# Altium PCB PCB1.PcbDoc
Units mil, origin at the board's own origin, x right, y up, seen from the top; angles counter-clockwise.
Board outline 2917.32 x 791.34 mil, 2 copper layers (Top Layer, Bottom Layer), stack 61.855 mil thick; 44 components, 37 nets, 168 pads, 85 vias.
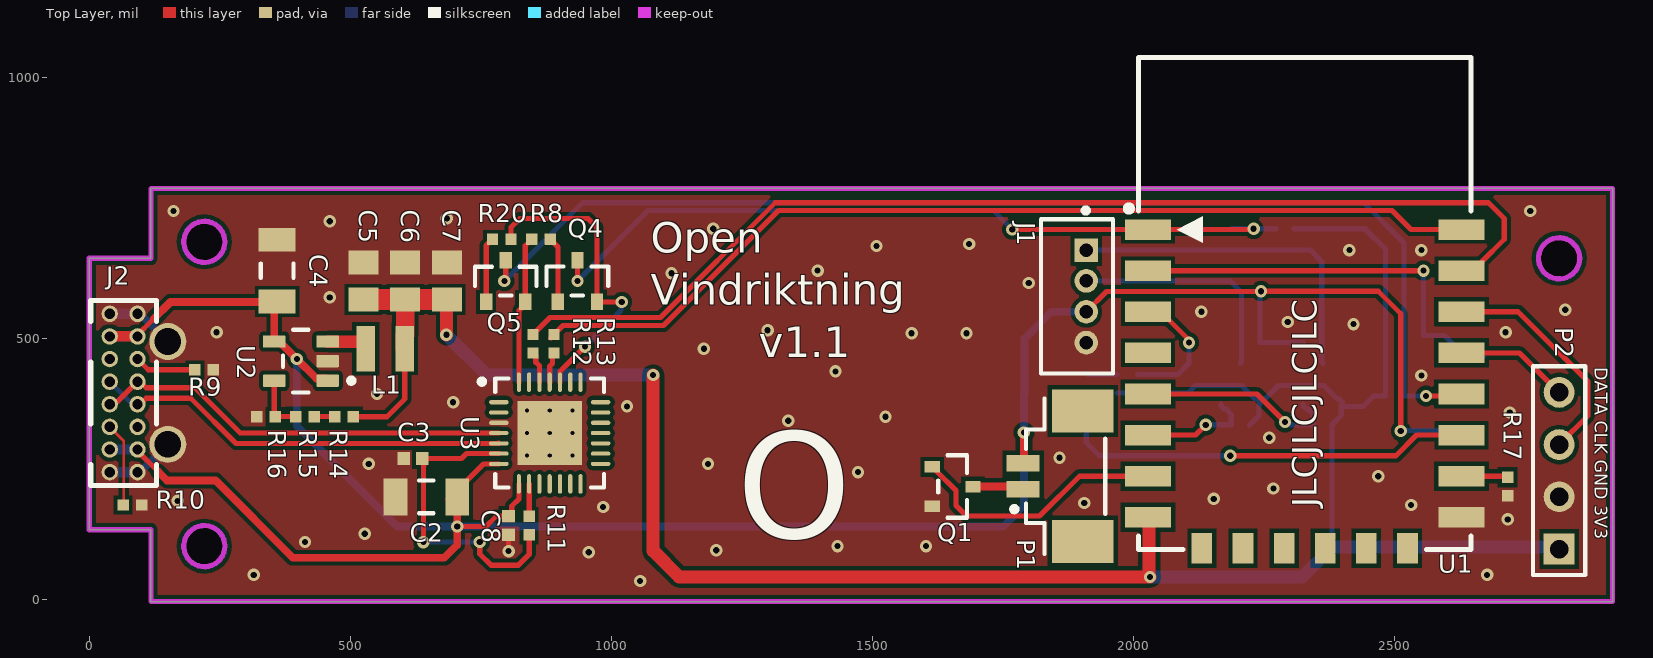
[diagram p0: Top Layer view]
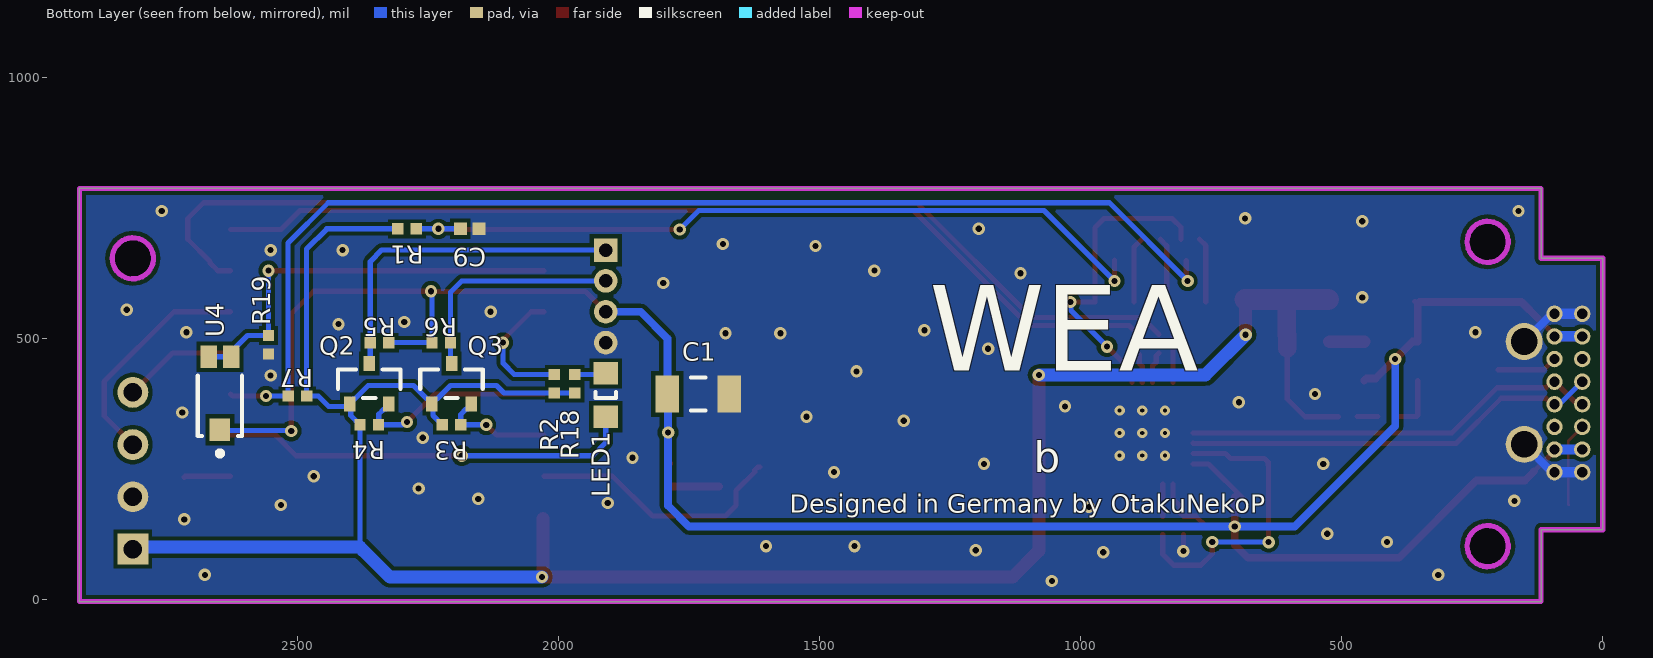
[diagram p1: Bottom Layer view, seen from below]
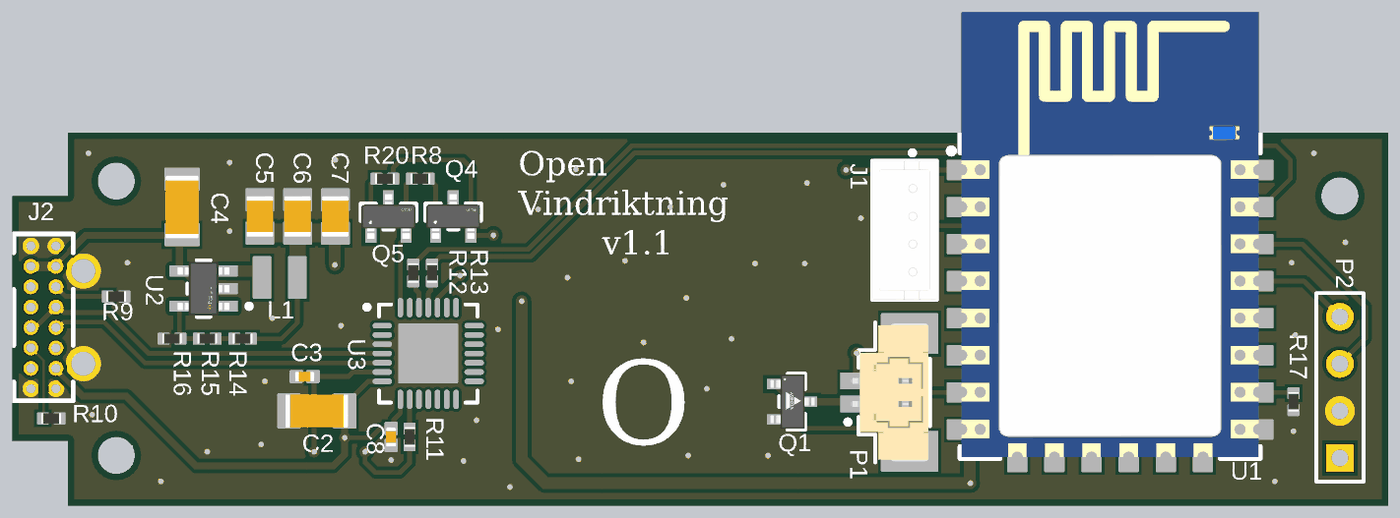
[diagram p2: 3D render of the assembled board from above, using the file's embedded part models]
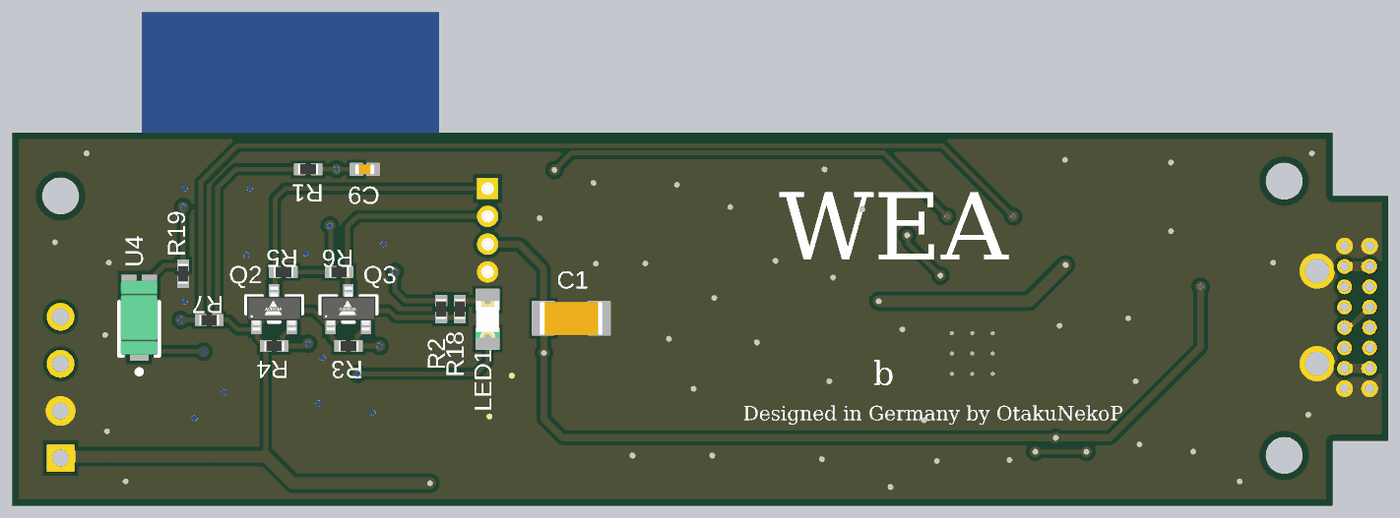
[diagram p3: 3D render of the assembled board from below, using the file's embedded part models]

## Layer stack, top to bottom
Top Solder: solder mask 0.4, Solder Resist, Dk 3.5
Top Layer: signal copper 1.4
Dielectric 1: dielectric 59.0551, FR-4, Dk 4.8
Bottom Layer: signal copper 1.4
Bottom Solder: solder mask 0.4, Solder Resist, Dk 3.5

## Board outline
0,133.86 118.11,133.86 118.11,-3.94 2917.32,-3.94 2917.32,787.4 118.11,787.4 118.11,653.54 0,653.54
cut-out: 220.47,645.67 cw(c220.47,685.04) 181.1,685.04 cw(c220.47,685.04) 220.47,724.41 cw(c220.47,685.04) 259.84,685.04 cw(c220.47,685.04)
cut-out: 2775.59,653.54 ccw(c2814.96,653.54) 2814.96,614.17 ccw(c2814.96,653.54) 2854.33,653.54 ccw(c2814.96,653.54) 2814.96,692.91 ccw(c2814.96,653.54)
cut-out: 181.1,102.36 ccw(c220.47,102.36) 220.47,62.99 ccw(c220.47,102.36) 259.84,102.36 ccw(c220.47,102.36) 220.47,141.73 ccw(c220.47,102.36)

## Design rules (kind name [scope] priority, off if disabled: settings)
Clearance [All] p1: gap=7.87 ignorepadtopadclearanceinfootprint=TRUE except(5: Arc-Arc Arc-Track Track-Track; 10: Arc-Via Track-Via; 13: Arc-Hole Track-Hole SMDPad-Hole THPad-Hole Via-Hole Fill-Hole Poly-Hole Region-Hole)
DiffPairsRouting [All] p1: maxlimit=10 minlimit=3.5 mostfreqgap=10 toplayer_minwidth=3.5 toplayer_maxwidth=15 toplayer_prefwidth=15 bottomlayer_minwidth=3.5 bottomlayer_maxwidth=15 bottomlayer_prefwidth=15 maxuncoupledlength=500
HoleSize [All] p1: absolutevalues=TRUE maxlimit=248.03 minlimit=7.87 maxpercent=80.000 minpercent=20.000
HoleToHoleClearance [All] p1: gap=19.68 allowstackedmicrovias=TRUE
MinimumSolderMaskSliver [All] p1: minsoldermaskwidth=7.87
PasteMaskExpansion [All] p1: expansion=1.97
PlaneClearance [All] p1: clearance=7.87
PlaneConnect [All] p1: planeconnectstyle=Direct reliefexpansion=20 reliefentries=4 reliefconductorwidth=10 reliefairgap=10
PolygonConnect [All] p1: connectstyle=Direct reliefconductorwidth=10 reliefentries=4 polygonreliefangle="90 Angle" airgapwidth=10
RoutingCorners [All] p1: cornerstyle=Round minsetback=100 maxsetback=100
RoutingVias [All] p1: holewidth=15 width=30 viastyle="Through Hole" minholewidth=11.81 minwidth=23.62 maxholewidth=248.03 maxwidth=300
SilkToSilkClearance [All] p1: silktosilkclearance=0
SilkToSolderMaskClearance [IsPad] p1: minsilkscreentomaskgap=5.91 clearancetoexposedcopper=TRUE
SolderMaskExpansion [All] p1: expansion=1.97 istentingtop=FALSE
Width [All] p1: maxlimit=200 minlimit=5 preferedwidth=10
20 further rules are at their usual default settings.

## Classes and differential pairs
differential pair DBGUSB: +DBGUSB_P -DBGUSB_N

## Components (designator, comment, footprint, x,y, rotation, side; value= is the part's Value field where it differs from the comment)
C1 "C1206_22u" C1206 1732.28,393.7 r180 bottom value=22u
C2 "C1206_4u7" C1206 645.67,196.85 r180 top value=4u7
C3 "C0402_100n" C0402 620,270 r180 top value=100n
C4 "C1206_4u7" C1206 360,630 r90 top value=4u7
C5 "C0805_10u" C0805 525,610 r90 top value=_
C6 "C0805_10u" C0805 605,610 r90 top value=_
C7 "C0805_10u" C0805 685,610 r90 top value=_
C8 "C0402_100n" C0402 803.15,141.73 r270 top value=100n
C9 "C0402_100n" C0402 2170,710 r180 bottom value=100n
J1 "B4B-ZR(LF)(SN)" FP-B4B-ZR_LF_SN-MFG 1891.73,580.71 r90 top locked
J2 "TYPE-C-31-D-09" "New footprint 1" -18.7,297.24 r90 top locked
L1 "252010CDMCDDS-2R2MC" INDC2520X10N 566.93,480.31 r0 top
LED1 "150080SS75000" 0805_A 1909.45,391.73 r90 bottom
P1 "653102124022" 653102124022 1870.08,236.22 r90 top locked
P2 "I2C" HDR1X4 2814.96,96.85 r90 top locked
Q1 "SI2318DS-T1-E3" FP-S-03946-MFG 1653.54,216.54 r0 top
Q2 "SI2318DS-T1-E3" FP-S-03946-MFG 2362.2,413.39 r90 bottom
Q3 "SI2318DS-T1-E3" FP-S-03946-MFG 2204.72,413.39 r90 bottom
Q4 "SS8050-G" FP-SS8050-G-MFG 935,610 r90 top
Q5 "SS8050-G" FP-SS8050-G-MFG 797.6,609.76 r90 top
R1 "R0402_10k" R0402 2290,710 r180 bottom value=10k
R2 "R0402_10k" R0402 2007.87,413.39 r90 bottom value=10k
R3 "R0402_2k4" R0402 2204.72,334.65 r0 bottom value=2k4
R4 "R0402_2k4" R0402 2362.2,334.65 r0 bottom value=2k4
R5 "R0402_4k7" R0402 2342.52,492.13 r180 bottom value=4k7
R6 "R0402_4k7" R0402 2224.41,492.13 r0 bottom value=4k7
R7 "R0402_10k" R0402 2500,390 r180 bottom value=10k
R8 "R0402_10k" R0402 865,690 r0 top value=10k
R9 "R0402_5k1" R0402 220,440 r0 top value=5k1
R10 "R0402_5k1" R0402 82.68,181.1 r180 top value=5k1
R11 "R0402_4k7" R0402 842.52,141.73 r90 top value=4k7
R12 "R0402_22R" R0402 850,490 r90 top value=22R
R13 "R0402_22R" R0402 890,490 r90 top value=22R
R14 "R0402_430k" R0402 488.19,350.39 r0 top value=430k
R15 "R0402_12k" R0402 413.39,350.39 r0 top value=12k
R16 "R0402_100k" R0402 338.58,350.39 r0 top value=100k
R17 "R0402_10k" R0402 2716.54,216.54 r270 top value=10k
R18 "R0402_10k" R0402 1968.5,413.39 r90 bottom value=10k
R19 "R0402_100k" R0402 2555.12,488.19 r270 bottom value=100k
R20 "R0402_10k" R0402 790,690 r180 top value=10k
U1 "ESP8266-12E" ESP_12E 2012.8,708.66 r0 top locked
U2 "TLV62569DBVR" FP-DBV0005A-MFG 405.51,456.69 r180 top
U3 "CP2102-GMR" SLAB-QFN-28-3125x3125TP_M 881.89,318.9 r0 top locked
U4 "TEMD6010FX01" FP-6_541-5080_01-4-MFG 2648.35,395.12 r270 bottom

## Footprints (in the part's own frame and the unit in brackets; to place one, negate y for a bottom-side part, rotate by r counter-clockwise, add the part's x,y. Pads: shape width x height; smd on the part's side, far side on the other; paste and mask are expansions set on the pad)
0805_A [mm] "Chip LED, 2-Leads, Body 2.0x1.3mm, IPC Medium Density"
  rect 1.1x1.2 smd: 1(-1.05,0) 2(1.05,0)
  silkscreen extent -0.15,-0.5 0.15,0.5, body extent -1,-0.63 1,0.63, height 0.68
653102124022 [mm] "1.25mm SMT Male Vertical Shrouded Header, 2p"
  rect 0.81x1.6 smd: 1(-0.625,2.07) 2(0.625,2.07)
  rect 2.1x3 smd: MP1(-3.175,-0.83) MP2(3.175,-0.83)
  silkscreen extent -3.77,-1.92 3.77,2.62, body extent -3.72,-1.85 3.72,2.36, height 4.74
C0402 [mm]
  rect 0.62x0.62 smd: 1(-0.45,0) 2(0.45,0)
  body extent -0.53,-0.28 0.53,0.28, height 0.6
C0805 [mm]
  rect 1.15x1.45 smd: 1(-0.9,0) 2(0.9,0)
  body extent -1.1,-0.72 1.1,0.72, height 0.9
C1206 [mm]
  rect 1.15x1.8 smd: 1(-1.5,0) 2(1.5,0)
  silkscreen extent -0.35,-0.8 0.35,0.8, body extent -1.7,-0.9 1.7,0.9, height 1
ESP_12E [mm] "ESP-12 Wi-Fi Module by AI-Thinker"
  rect 2.25x1 smd: 1(0.375,0) 2(0.375,-2) 3(0.375,-4) 4(0.375,-6) 5(0.375,-8) 6(0.375,-10) 7(0.375,-12) 8(0.375,-14) 15(15.625,-14) 16(15.625,-12) 17(15.625,-10) 18(15.625,-8) 19(15.625,-6) 20(15.625,-4) 21(15.625,-2) 22(15.625,0)
  rect 1x1.5 smd: 9(3,-15.5) 10(5,-15.5) 11(7,-15.5) 12(9,-15.5) 13(11,-15.5) 14(13,-15.5)
  silkscreen extent -0.7,-15.57 16.08,8.37, body extent 0,-15.49 16,8.51, height 2.75
FP-6_541-5080_01-4-MFG [mm]
  rect 1.1x0.8 smd paste+0 mask+0: 1(-1.775,0.55) 3(-1.775,-0.55)
  rect 1.1x1 smd paste+0 mask+0: 2(1.775,0)
  silkscreen extent -0.85,-1.07 3.05,1.07, body extent -2,-1 2,1, height 1.2
FP-B4B-ZR_LF_SN-MFG [mm]
  rect 1.15x1.15 hole 0.65 paste-1000 mask+0: 1(2.25,-0.45)
  round 1.15 hole 0.65 paste-1000 mask+0: 2(0.75,-0.45) 3(-0.75,-0.45) 4(-2.25,-0.45)
  silkscreen extent -3.75,-1.75 4.3,1.75, body extent -3.85,-1.85 3.85,1.85, height 0.25
FP-DBV0005A-MFG [mm]
  rrect17% 1.1x0.6 smd paste+0 mask+0: 1(-1.3,0.95) 2(-1.3,0) 3(-1.3,-0.95) 4(1.3,-0.95) 5(1.3,0.95)
  silkscreen extent -2.58,-1.53 0.87,1.53, body extent -1.95,-1.78 1.95,1.78, height 0.25
FP-S-03946-MFG [mil]
  rect 29x22 smd paste+0 mask+0: 1(-39,37.5) 2(-39,-37.5) 3(39,0)
  silkscreen extent -28,-60 28,60, body extent -57,-64 57,64, height 10
FP-SS8050-G-MFG [mm]
  rect 0.8x0.6 smd paste+0 mask+0: 1(-1.01,0.95) 2(-1.01,-0.95) 3(1.01,0)
  silkscreen extent -0.7,-1.5 0.7,1.5, body extent -1.51,-1.6 1.51,1.6, height 0.25
HDR1X4 [mm] "Connector; Header; 4 Position"
  rect 1.5x1.5 hole 0.9: 1(0,0)
  round 1.5 hole 0.9: 2(2.54,0) 3(5.08,0) 4(7.62,0)
  silkscreen extent -1.27,-1.27 8.89,1.27
INDC2520X10N [mm] "Chip Inductor, 2-Leads, Body 2.50x2.00mm, IPC Medium Density"
  rect 0.9x2.2 smd: 1(-0.95,0) 2(0.95,0)
  body extent -1.35,-1.1 1.35,1.1, height 1
"New footprint 1" [mm]
  round 0 all layers, no hole: 17(5,0) 18(0,0)
  round 1.8 hole 1.3: 19(0,-4.3) 20(5,-4.3)
  round 0.8 hole 0.5: A1(-1.35,-1.475) A4(-0.25,-1.475) A5(0.85,-1.475) A6(1.95,-1.475) A7(3.05,-1.475) A8(4.15,-1.475) A9(5.25,-1.475) A12(6.35,-1.475) B1(6.35,-2.825) B4(5.25,-2.825) B5(4.15,-2.825) B6(3.05,-2.825) B7(1.95,-2.825) B8(0.85,-2.825) B9(-0.25,-2.825) B12(-1.35,-2.825)
  silkscreen extent -2,-3.75 7,-0.55
R0402 [mm]
  rect 0.55x0.55 smd: 1(-0.45,0) 2(0.45,0)
  body extent -0.53,-0.28 0.53,0.28, height 0.4
SLAB-QFN-28-3125x3125TP_M [mm] "QFN, 28-Leads, Body 5x5mm, Pitch 0.5mm, Thermal Pad 3.13x3.13mm, IPC Low Density"
  oval 0.95x0.2 smd: 1(-2.475,1.5) 2(-2.475,1) 3(-2.475,0.5) 4(-2.475,0) 5(-2.475,-0.5) 6(-2.475,-1) 7(-2.475,-1.5) 15(2.475,-1.5) 16(2.475,-1) 17(2.475,-0.5) 18(2.475,0) 19(2.475,0.5) 20(2.475,1) 21(2.475,1.5)
  oval 0.2x0.95 smd: 8(-1.5,-2.475) 9(-1,-2.475) 10(-0.5,-2.475) 11(0,-2.475) 12(0.5,-2.475) 13(1,-2.475) 14(1.5,-2.475) 22(1.5,2.475) 23(1,2.475) 24(0.5,2.475) 25(0,2.475) 26(-0.5,2.475) 27(-1,2.475) 28(-1.5,2.475)
  rect 3.13x3.13 smd: 29(0,0)
  silkscreen extent -3.42,-2.65 2.65,2.65, body extent -2.5,-2.5 2.5,2.5, height 1

## Part data
C1: library part CMP-003-0098-1, Dielectric=X5R, Hidden Value=C226, Manufacturer 1=Kemet, Manufacturer Part Number 1=C1206C226M8PAC, Tolerance=0.2%, Voltage Rating DC=10V, Component Type=Standard, Part Number=C1206_22u, Pin Count=2
C2 C4: library part CMP-003-0093-1, Dielectric=X7R, Hidden Value=C475, Manufacturer 1=Kemet, Manufacturer Part Number 1=C1206C475K4RAC, Tolerance=0.1%, Voltage Rating DC=16V, Component Type=Standard, Part Number=C1206_4u7, Pin Count=2
C3 C8 C9: library part CMP-003-0006-1, Dielectric=X7R, Manufacturer 1=Kemet, Manufacturer Part Number 1=C0402C104K4RACTU, Tolerance=0.1%, Voltage Rating DC=16V, Component Type=Standard, Part Number=C0402_100n, Pin Count=2
C5 C6 C7: library part CMP-003-0002-1, "C0805", Dielectric=X7R, Manufacturer 1=Kemet, Tolerance=0.05%, Voltage Rating DC=25V, Component Type=Standard, Part Number=C0805, Pin Count=2
J1: library part CMP-17439-000033-1, "CONN HEADER VERT 4POS 1.5MM", Color=Natural, Contact Resistance=30mR, Current Rating=1A, Flammability Rating="UL94 V-0", Housing Color=Beige, Insulation Resistance=500MR, Max Operating Temperature=85°C, Max Voltage Rating (AC)=50V, Min Operating Temperature=-25°C, Body Plating=Tin, Connector Type="Male Pin", Contact Material=Brass, Contact Mating Length=0.094inch, Contact Plating=Tin, Contact Type="Male Pin", Depth=3.5mm, Fastening Type=Detent, Gender=Male, Housing Material=Polyamide, Lead Free="Lead Free", Lead Pitch=1.5mm, Length=7.5mm, Material=Nylon, Max Current Rating=1A, Mount="Through Hole", Number of Contacts=4, Number of Positions=4, Number of Rows=1, Orientation=Straight, Packaging=Bulk, Panel Thickness=3.5mm, Pitch=1.5mm, REACH SVHC="No SVHC", Series=ZH, Termination=Solder, Voltage Rating=50V, Voltage Rating (AC)=50V, Voltage Rating (DC)=50V
J2: library part CMP-011-000001-1
L1: library part CMP-00003-2, "Fixed Ind 2.2UH 2.5A 97 Mohm SMD"
LED1: library part CMP-1426-00010-1, "SMD mono-color Chip LED, WL-SMCW, Super Red", Color="Super Red", Manufacturer="Wuerth Elektronik", ComponentLink1Description="Manufacturer URL", ComponentLink1URL=http://www.we-online.com, ComponentLink2Description=Datasheet, ComponentLink2URL=http://katalog.we-online.com/led/datasheet/150080SS75000.pdf, PackageReference=0805_A, PartNumber=150080SS75000
P1: library part CMP-1502-00757-1, "Male Shrouded Header WR-WTB, SMT, Vertical, pitch 1.25 mm, 1 x 2 position", Contact Resistance=20mOhm, Manufacturer="Wurth Elektronik", Operating Temperature=-40to85degC, Working Voltage=125VAC, Datasheet URL=https://katalog.we-online.de/em/datasheet/6531xx124022.pdf, Gender=Male, Manufacturer URL=http://www.we-online.de, Mounting Technology=SMT, Orientation=Vertical, Package Reference=653102124022, Packaging=TapeandReel, Part Number=653102124022, Pitch=1.25mm, Position=1x2, Publisher=WurthElektronik
P2: library part "Header 4", "Header, 4-Pin", LatestRevisionDate=17-Jul-2002, LatestRevisionNote="Re-released for DXP Platform.", Publisher="Altium Limited"
Q1 Q2 Q3: library part CMP-02550-000015-1, "MOSFET N-CH 40V 3A SOT23-3", Continuous Drain Current=3A, Drain To Source Breakdown Voltage=40V, Drain To Source Resistance=0.036Ω, Gate To Source Voltage=20V, Input Capacitace At Vds="540pF @ 20V", Manufacturer=Vishay, Max Forward Diode Voltage=1.2V, Max Junction Temp=+150°C, Package=S-03946, Power Dissipation=0.75W, Pulse Drain Current=16A, Temperature="-55°C to +150°C", Temperature Range Low=-55°C, Typ Forward Diode Voltage=0.8V, Automotive=No, Category=Trans, ComponentLink2Description=Datasheet, ComponentLink2URL=http://www.vishay.com/docs/72322/72322.pdf, Depletion Mode=False, Device Class L1="Discrete Semiconductors", Device Class L2=Transistors, Device Class L3=MOSFETs, Digikey Description="MOSFET N-CH 40V 3A SOT23-3", Drain To Source Voltage=40V, Gate Charge At Vgs="10nC @ 10V", Height=1.12mm, Lead Free=Yes, Manufacturer Part Number=SI2318DS-T1-E3, Mouser Description="MOSFET 40V 6A", Number Of Channels=1, Number Of N Channels=1, Octopart=https://octopart.com/si2318ds-t1-e3-vishay-40866469, RoHS=TRUE, Rthja Max=120°C/W, Standoff Height=0.01mm, Temperature Range High=+150°C, Threshold Vgs Max=3V, Threshold Vgs Min=1V, Transconductance=11S, Turn Off Delay Time=20ns, Turn On Delay Time=5ns
Q4 Q5: library part CMP-20235-000001-1, "NPN TRANSISTOR 1.5A 40V SOT-23 R", Case/Package=TO-236-3, Collector Emitter Breakdown Voltage=25V, Collector Emitter Voltage (VCEO)=400mV, Max Collector Current=1.5A, Max Power Dissipation=300mW, Transition Frequency=100MHz, Max Breakdown Voltage=25V, Mount="Surface Mount", Packaging="Tape and Reel", RoHS Compliant=Yes
R1 R2 R7 R8 R17 R18 R20: library part CMP-004-0443-1, Manufacturer 1=Vishay, Manufacturer Part Number 1=CRCW040210K0FKED, Power Rating=62,5mW, Tolerance=1%, Component Type=Standard, Part Number=R0402_10k, Pin Count=2
R3 R4: library part CMP-004-0428-1, Manufacturer 1=Vishay, Manufacturer Part Number 1=CRCW04022K40FKED, Power Rating=62,5mW, Tolerance=1%, Component Type=Standard, Part Number=R0402_2k4, Pin Count=2
R5 R6 R11: library part CMP-004-0435-1, Manufacturer 1=Vishay, Manufacturer Part Number 1=CRCW04024K70FKED, Power Rating=62,5mW, Tolerance=1%, Component Type=Standard, Part Number=R0402_4k7, Pin Count=2
R9 R10: library part CMP-004-0436-1, Manufacturer 1=Vishay, Manufacturer Part Number 1=CRCW04025K10FKED, Power Rating=62,5mW, Tolerance=1%, Component Type=Standard, Part Number=R0402_5k1, Pin Count=2
R12 R13: library part CMP-004-0379-1, Manufacturer 1=Vishay, Manufacturer Part Number 1=CRCW040222R0FKED, Power Rating=62,5mW, Tolerance=1%, Component Type=Standard, Part Number=R0402_22R, Pin Count=2
R14: library part CMP-004-0482-1, Manufacturer 1=Vishay, Manufacturer Part Number 1=CRCW0402430KFKED, Power Rating=62,5mW, Tolerance=1%, Component Type=Standard, Part Number=R0402_430k, Pin Count=2
R15: library part CMP-004-0445-1, Manufacturer 1=Vishay, Manufacturer Part Number 1=CRCW040212K0FKED, Power Rating=62,5mW, Tolerance=1%, Component Type=Standard, Part Number=R0402_12k, Pin Count=2
R16 R19: library part CMP-004-0467-1, Manufacturer 1=Vishay, Manufacturer Part Number 1=CRCW0402100KFKED, Power Rating=62,5mW, Tolerance=1%, Component Type=Standard, Part Number=R0402_100k, Pin Count=2
U1: "串口 WIFI模块，ESP-12E", BOM名称=WIFI模块, 学习资源=www.ooocke.com, 版权归属=源创客
U2: library part CMP-04918-000387-1, "IC REG BUCK ADJ 2A SOT23-5", Case/Package=SOT-23-5, Max Input Voltage=5.5V, Max Operating Temperature=125°C, Min Input Voltage=2.5V, Min Operating Temperature=-40°C, Min Output Voltage=600mV, Output Current=2A, Switching Frequency=1.5MHz, Max Output Voltage=5.5V, Mount="Surface Mount", Output Configuration=Positive, Output Type=Adjustable, Packaging="Cut Tape", RoHS Compliant=Yes, Synchronous Rectifier=Yes
U3: library part CMP-2000-04924-1, "Single-Chip USB to URAT Bridge, 3.3 V, -40 to 85 degC, 28-Pin QFN, RoHS, Tape and Reel", Manufacturer="Silicon Labs", Operating Supply Voltage (Max)=3.6V, Operating Supply Voltage (Min)=3V, Operating Supply Voltage (Typ)=3.3V, Operating Temperature (Max)=85C, Operating Temperature (Min)=-40C, Operating Temperature Classification=Industrial, Package Description="28-Pin Quad-Flat No-Leads Package, Body 5 x 5 mm, Pitch 0.5 mm", Package Reference=QFN-28, Package Type=QFNEP, Supply Current=26mA, Data Rate=1000kbps, Datasheet URL=http://www.mouser.com/ds/2/368/CP2102-9-247052.pdf, Datasheet Version="Rev. 1.6, 12/2013", Interface Circuit Standard 1=RS-232, Manufacturer URL=http://www.silabs.com/, Mounting=SurfaceMount, Number Of Channels=1, Package URL=http://www.silabs.com/Support%20Documents/TechnicalDocs/C8051T61x.pdf, Packaging=TapeandReel, Pin Count=28, Rad Hardened=No, Transmitter and Receiver FIFO Counter=No
U4: library part CMP-02531-000006-1, "SENSOR PHOTODIODE 540NM SMD", Case/Package=1206, Dark Current=2nA, Max Operating Temperature=100°C, Max Power Dissipation=100mW, Max Reverse Voltage (DC)=16V, Min Operating Temperature=-40°C, Package Quantity=3000, Diode Type=PIN, Height=1.05mm, Lead Free="Lead Free", Length=2mm, Mount="Surface Mount", Number of Pins=3, Packaging="Tape and Reel", Power Dissipation=100mW, Radiation Hardening=No, Reverse Breakdown Voltage=16V, Reverse Voltage (DC)=16V, RoHS Compliant=Yes, Series=TEMDxxxxFX01, Viewing Angle=120°, Wavelength=540nm, Width=4mm

## Via types
v1: diameter 23.62, hole 11.81, Top Layer to Bottom Layer, tented both sides, 76 vias
v2: diameter 19.68, hole 7.87, Top Layer to Bottom Layer, tented both sides, 9 vias

## Nets (pads, with @x,y where several pads share a name; then routed paths per layer and width w, separated by ;. In a path a pad name is that pad's centre, name@x,y a point inside that pad or via, vN(x,y) a via of type N, cw(c..) or ccw(c..) an arc to the next point about the centre after c; other vN are vias at no path point)
3V3: C5.1 C6.1 C7.1 L1.2 P2.1 Q2.1 Q3.1 R1.1 R2.1 R3.2 R4.2 R7.2 R14.2 R18.1 U1.8 | length 4581.5
  Top Layer w10: R14.2 506.3,350 570.47,350 604.33,383.86 L1.2
  Top Layer w15: U1.8 U1.8@2030,155.04
  Top Layer w25: v1(684,507.02) C7.1@684,573.94 ; v1(1080,430) 1080,93.23 1129.92,43.31 v1(2031.5,43.31) 2030,44.8 U1.8@2030,155.04
  Top Layer w35: L1.2@604.55,480.98 604.55,506.12 605,506.57 C6.1
  Top Layer w40: C5.1 C6.1 C7.1
  Bottom Layer w10: R18.1 R2.1 2104.33,395.67 2118.66,410 2206.61,410 2232.72,383.88 2236.22,383.88 Q3.1@2242.22,377.88 ; R3.2 2240.31,352.51 2240.31,372.47 Q3.1 Q3.1@2242.22,377.88 ; R1.1 2443.54,710 2482.28,671.26 R7.2 2460,390 2440,370 2404.09,370 Q2.1 ; 2379.92,88.58 2379.92,100.39 R4.2 2397.79,352.51 2397.79,372.47 Q2.1 ; Q3.1@2242.22,377.88 2248.22,383.88 2251.72,383.88 2277.84,410 2364.09,410 2390.2,383.88 2393.7,383.88 2399.7,377.88 Q2.1
  Bottom Layer w25: v1(684,507.02) 761.02,430 v1(1080,430) ; v1(2031.5,43.31) 2322.83,43.31 2379.92,100.39 2811.42,100.39 P2.1
5V: C1.1 C2.1 C4.1 C8.1 J1.3 J2.A4 J2.A9 J2.B4 J2.B9 P1.2 R5.2 R6.2 U2.1 U2.4 U3.7 U3.8 U4.2 | length 5091
  Top Layer w10: J2.B9 92.52,284.57 131.46,245.63 ; J2.B4 ccw(c88.73,513.19) 97.84,509.06 cw(c165.37,478.79) 100.81,514.97 cw(c109.51,510.04) 104.38,518.62 123.59,537.83 ; C4.1@354.33,565.28 C4.1 ; C2.1@687.09,192.01 754.92,259.84 U3.7 ; v1(704.72,140) 760,140 779.45,159.45 C8.1 809.11,165.41 809.11,179.11 822.83,192.83 U3.8 ; J1.3 1948.27,590 2243.54,590 v1(2244.09,590.55) 2468.5,590.55 2511.81,547.24 v1(2511.81,322.83)
  Top Layer w15: 123.59,537.83 155.75,570 C4.1@350.89,570 ; 131.46,245.63 148.74,228.35 241.7,228.35 390.05,80 680,80 704.72,104.72 v1(704.72,140) C2.1 ; C4.1@354.33,565.28 U2.4 364.17,494.09 v1(397.64,460.63) 434.67,423.6 452.38,423.6 U2.1 ; P1.2 1790,262.24 v1(1790,320)
  Top Layer w20: J2.A9 J2.B4
  Bottom Layer w10: v1(2244.09,590.55) 2242.13,588.58 R6.2 R5.2 ; v1(2511.81,322.83) 2512.8,323.82 U4.2@2659.45,323.82
  Bottom Layer w15: v1(397.64,460.63) 397.61,332.39 590,140 v1(704.72,140) 1750.24,140 1790,179.76 v1(1790,320) 1790,392.36 C1.1 1791.34,500 1842.52,551.18 J1.3
  Bottom Layer w20: J2.A4 J2.B9 ; J2.A9 J2.B4
ADC: R19.1 U1.2 U4.1 U4.3 | length 793.1
  Top Layer w10: U1.2 v1(2555.12,629.92)
  Bottom Layer w10: v1(2555.12,629.92) R19.1 2595.47,505.91 U4.1@2636.38,465 ; U4.1 U4.1@2636.38,465 ; U4.3 U4.1@2636.38,465
CP2102_RXD: R13.2 U1.22 | length 1860.2
  Top Layer w10: R13.2@883.71,501.42 907.28,525 1100,525 1320,745 2495,745 2531.34,708.66 U1.22
CP2102_TXD: R12.2 U1.21 | length 2125.4
  Top Layer w10: R12.2 882.28,540 1093.79,540 1313.79,760 2680,760 2710,730 2710,690 2667.24,647.24 2667.24,644.61 2652.56,629.92 U1.21
DBGUSB_N: J2.A7 J2.B7 U3.5 | length 803.9
  Top Layer w10: J2.B7 97.47,374.01 109.13,385.67 194.33,385.67 281.1,298.9 784.13,298.9 U3.5
  Bottom Layer w10: J2.A7 78.57,378.13 88.41,378.13 J2.B7
DBGUSB_P: J2.A6 J2.B6 U3.4 | length 803.8
  Top Layer w10: J2.A6 43.48,378.13 53.33,378.13 J2.B6 97.47,417.32 109.13,405.67 202.62,405.67 289.39,318.9 U3.4
FAN: P1.1 Q1.3 | length 98.1
  Top Layer w10: P1.1@1783.66,216.54 P1.1
  Top Layer w15: Q1.3 P1.1@1783.66,216.54
GND: C1.2 C2.2 C3.2 C4.2 C5.2 C6.2 C7.2 C8.2 C9.2 J1.4 J2.17 J2.18 J2.19 J2.20 J2.A1 J2.A12 J2.B1 J2.B12 P2.2 Q1.2 R9.2 R10.1 R16.1 R17.2 R19.2 U1.15 U2.2 U3.3 U3.29 | length 297.7
  Top Layer w10: v1(803.15,92.76) C8.2
  Bottom Layer w10: J2.B12 J2.B12@97.44,244.09 ; J2.B1 J2.B1@97.44,547.24
  Bottom Layer w15: J2.B12@97.44,244.09 J2.19 ; J2.B1@97.44,547.24 J2.20
  Bottom Layer w20: J2.A1 J2.B12 ; J2.A12 J2.B1
  other v1: 1055.12,35.43 314.96,47.24 2677.17,47.24 956.69,90.55 1200.79,94.49 1433.07,102.36 1602.36,102.36 413.39,110.24 527.56,125.98 2716.54,153.54 984.25,177.17 2531.5,181.1 1905.51,185.04 169.29,188.98 2153.54,192.91 2267.72,212.6 2468.5,236.22 1472.44,244.09 535.43,259.84 1185.04,259.84 1858.27,271.65 2260,310 1338.58,342.52 1525,350 2720.47,358.27 1030,370 696.85,377.95 551.18,393.7 2551.18,429.13 1429.13,437.01 1177.17,480.31 1575,510 1680,510 244.09,511.81 2712.6,511.81 1299.21,515.75 2421.26,527.56 2295.28,531.5 2129.92,551.18 2826.77,555.12 460.63,578.74 1799.21,606.3 1115,625 1395,630 2413.39,669.29 2551.18,669.29 1507.87,677.17 1685.04,681.1 1195,710 460.63,724.41 685,730 161.42,744.09 2759.84,744.09
  other v2: 838.58,275.59 881.89,275.59 925.2,275.59 838.58,318.9 881.89,318.9 925.2,318.9 838.58,362.2 881.89,362.2 925.2,362.2
GPIO0: Q5.3 R7.1 U1.18 | length 2262.2
  Top Layer w10: v1(795,610) 797.6,612.6 Q5.3 ; v1(2560,390) 2624.25,390 U1.18
  Bottom Layer w10: v1(795,610) 945,760 2440.79,760 2517.72,683.07 R7.1 v1(2560,390)
GPIO2: LED1.1 U1.17 | length 795
  Top Layer w10: v1(2185.04,275.59) 2502.48,275.59 2541.85,314.96 U1.17
  Bottom Layer w10: LED1.1 1909.45,300.55 1934.41,275.59 v1(2185.04,275.59)
GPIO12: Q3.2 R3.1 U1.6 | length 217.6
  Top Layer w10: U1.6 2118.65,314.96 v1(2138.33,334.65)
  Bottom Layer w10: v1(2138.33,334.65) R3.1 ; Q3.2 2167.22,370.88 2173.22,364.88 2176.72,364.88 2186.99,354.61 R3.1
GPIO13: Q1.1 U1.7 | length 502.3
  Top Layer w10: Q1.1 1618.04,254.04 1624.04,248.04 1624.04,244.54 1660,208.58 1660,180 1680,160 1820,160 1896.22,236.22 U1.7
GPIO14: Q2.2 R4.1 U1.5 | length 391.1
  Top Layer w10: U1.5 2236.3,393.7 v1(2290,340)
  Bottom Layer w10: v1(2290,340) 2293.69,340 2299.04,334.65 R4.1 ; Q2.2 2324.7,370.88 2330.7,364.88 2334.2,364.88 2344.27,354.82 R4.1@2344.27,334.87
GPIO15: R17.1 U1.16 | length 89.4
  Top Layer w10: U1.16 2714.57,236.22 R17.1
I2C_SCL: P2.3 U1.20 | length 440.8
  Top Layer w10: U1.20 2736.22,551.18 2870,417.4 2870,351.89 P2.3
I2C_SDA: P2.4 U1.19 | length 218.3
  Top Layer w10: U1.19 2739.37,472.44 P2.4
NetC3_1: C3.1 R11.1 U3.6 | length 583.6
  Top Layer w10: v1@640,110.39 640,256.94 640.51,257.45 640.51,262.8 647.72,270 712.91,270 722.44,279.53 U3.6 ; v1(748.03,110.24) 748.03,87.6 769.68,65.94 821.85,65.94 842.52,86.61 R11.1
  Bottom Layer w10: v1(640,110) v1@748.03,110
NetJ2_A5: J2.A5 R10.2 | length 161.2
  Top Layer w5.5: J2.A5 66.15,303.93 66.15,182.29 R10.2
NetJ2_B5: J2.B5 R9.1 | length 116
  Top Layer w10: J2.B5 113.15,440 R9.1@200,440
NetL1_1: L1.1 U2.3 | length 66.9
  Top Layer w24: U2.3 L1.1@523.62,494.09
NetLED1_2: LED1.2 R18.2 | length 59.9
  Bottom Layer w10: LED1.2 1911.42,431.1 R18.2
NetQ4_1: Q4.1 R8.2 | length 125.9
  Top Layer w10: R8.2 897.6,675.12 Q4.1
NetQ4_2: Q4.2 R20.1 U3.24 | length 594.7
  Top Layer w10: R20.1 807.72,713.01 824.71,730 955,730 972.4,712.6 Q4.2 972.64,570 v1(1020,570) ; U3.24 901.57,436.57 v1(949.44,484.44)
  Bottom Layer w10: v1(949.44,484.44) 1018.54,553.54 1018.54,568.54 v1(1020,570)
NetQ5_1: Q5.1 R20.2 | length 125
  Top Layer w10: Q5.1 760.2,677.91 R20.2
NetQ5_2: Q5.2 R8.1 U3.28 | length 283.8
  Top Layer w10: U3.28 822.83,553.9 835,566.06 Q5.2 835,677.72 R8.1
NetR2_2: R2.2 U1.3 | length 252.8
  Top Layer w10: U1.3 2052.17,551.18 2103.69,499.65 2103.69,494.73 v1(2106.3,492.13)
  Bottom Layer w10: R2.2 2084.65,431.1 2106.3,452.76 v1(2106.3,492.13)
NetR11_2: R11.2 U3.9 | length 62
  Top Layer w10: R11.2 U3.9
NetR12_1: R12.1 U3.26 | length 61
  Top Layer w10: R12.1 855.29,466.99 855.29,454.71 862.2,447.8 U3.26
NetR13_1: R13.1 U3.25 | length 59.3
  Top Layer w10: U3.25 881.89,446.89 887.31,452.31 887.31,469.6 R13.1
NetR14_1: R14.1 R15.2 | length 39.4
  Top Layer w10: R15.2 R14.1
NetR15_1: R15.1 R16.2 U2.5 | length 109.1
  Top Layer w10: U2.5 354.33,352.36 R16.2 R15.1
PM_RX: J1.2 Q3.3 R6.1 | length 443.2
  Bottom Layer w10: J1.2 2185.04,610.24 2206.69,588.58 R6.1 2206.69,454.36 Q3.3
PM_TX: J1.1 Q2.3 R5.1 | length 655.8
  Bottom Layer w10: J1.1 2338.58,669.29 2360.24,647.64 R5.1 2360.24,454.36 Q2.3
RESET: C9.1 Q4.3 R1.2 U1.1 | length 1490.9
  Top Layer w10: v1(935,610) Q4.3 ; v1(1767.72,708.66) U1.1 2228.66,708.66 v1(2230,710)
  Bottom Layer w10: v1(935,610) 1070,745 1731.38,745 v1(1767.72,708.66) ; C9.1 v1(2230,710) R1.2
SBU1: J2.A8
SBU2: J2.B8
pads on no net: P1.MP1 P1.MP2 U1.4 U1.9 U1.10 U1.11 U1.12 U1.13 U1.14 U3.1 U3.2 U3.10 U3.11 U3.12 U3.13 U3.14 U3.15 U3.16 U3.17 U3.18 U3.19 U3.20 U3.21 U3.22 U3.23 U3.27

## Polygon pours and split planes (outlines as drawn)
GND on Bottom Layer "GND_L02_P000" (solid, remove dead copper, pour order 0): 2913.39,787.4 2913.39,0 118.11,0 118.11,137.8 0,137.8 0,649.61 118.11,649.61 118.11,787.4
GND on Top Layer "GND_L01_P001" (solid, remove dead copper, pour order 1): 2913.39,787.4 2913.39,0 118.11,0 118.11,137.8 0,137.8 0,649.61 118.11,649.61 118.11,787.4

## Keep-outs
Keep-Out Layer:
  circle w10: c2814.96,653.54 r39.37
  circle w10: c220.47,102.36 r39.37
  circle w10: c220.47,685.04 r39.37
  lines w10: 0,133.86 118.11,133.86 118.11,-3.94 2917.32,-3.94 2917.32,787.4 118.11,787.4 118.11,653.54 0,653.54 0,133.86

## Silkscreen, mask and mechanical layers (free items; w line width, h text height)
Top Overlay:
  text "Open / Vindriktning /         v1.1" at 1075,445 h100
  text "DATA CLK GND 3V3" at 2875,445 h42 r270
  text "JLCJLCJLCJLC" at 2366.14,177.16 h80 r90
  text "O" at 1240,50 h350
Bottom Overlay:
  text "WEA" at 1290,385 h280
  text "b" at 1090,225 h100
  text "Designed in Germany by OtakuNekoP" at 1557.5,155 h60

## Text inside footprints (layer, text, board x,y; h text height)
U1: Mechanical 13 "CUTOUT POLYGON" at 2017.8,998.66 h10; Mechanical 13 "ANTENNA AREA" at 2017.8,1018.66 h10